# EAGLE board source_eagle (EAGLE 9.6.2)
REV: A
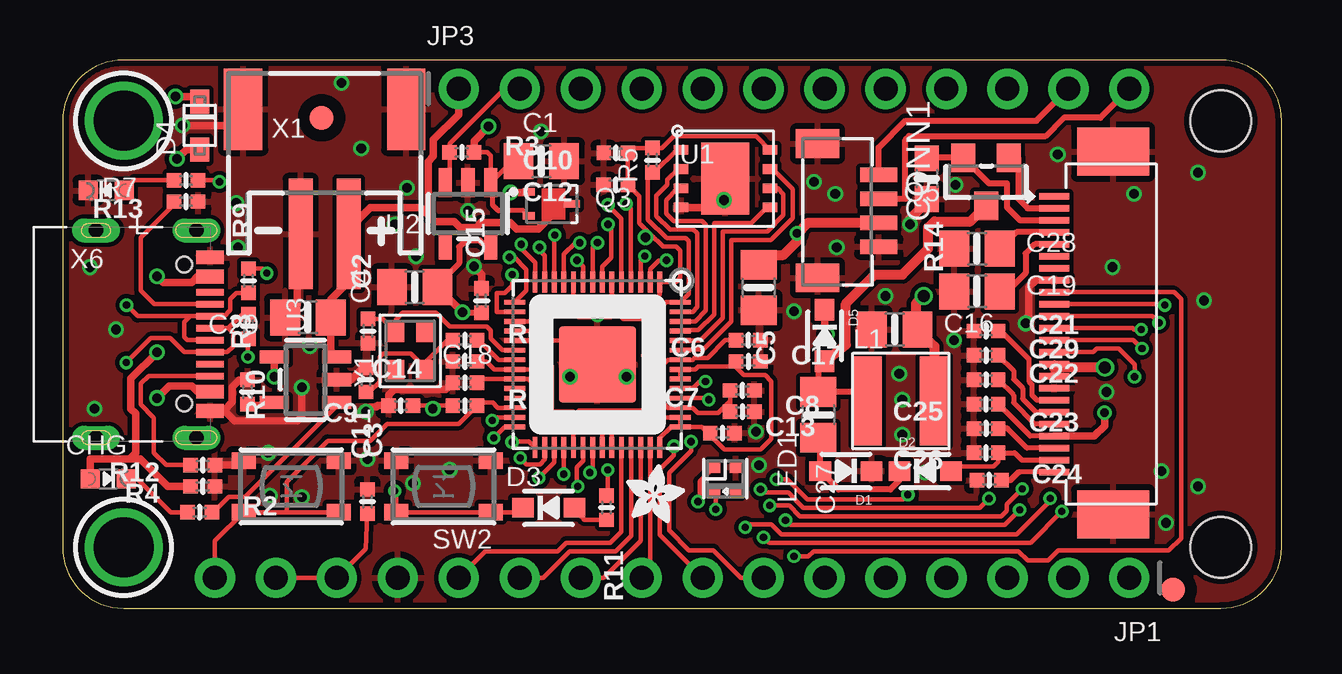
[diagram p0: board, top side]
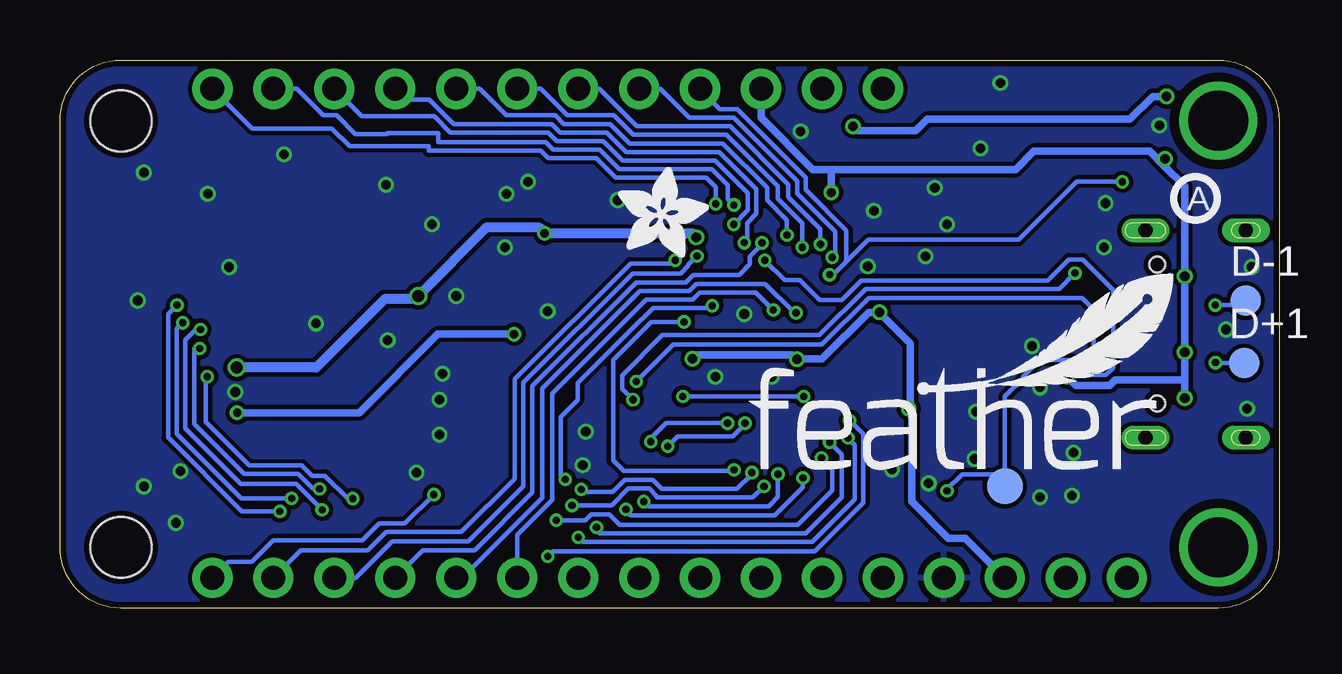
[diagram p1: board, bottom side, seen from below]

Size 50.8 x 22.86 mm. Coordinates in mm from the lower left corner, seen from the top.
Outline: 2.54,0 48.26,0 arc90 50.8,2.54 50.8,20.32 arc90 48.26,22.86 2.54,22.86 arc90 0,20.32 0,2.54 arc90 2.54,0
Copper layers (1*16): Top 0.035mm / dielectric 1.5mm / Bottom 0.035mm
Design rules "adafruit 7-7 *": minimum track width 7mil, minimum drill 8mil, track to track 7mil, track to pad 7mil, pad to pad 7mil, via to via 7mil, smd to smd 7mil, copper to edge 10mil, drill to drill 8mil, minimum pad ring 7mil, minimum via ring 5mil, stop-mask expansion 2mil, vias tented up to drill 20mil, thermal gap 10mil
Net classes: 1 power: width 0.305 mm; 2 lowpower: width 0.254 mm, drill 0.381 mm
Holes 2.54 mm at 48.26,20.32 48.26,2.54

## Footprints (pad centres in the part's own frame; a part is rotated, then mirrored left to right if it is on the bottom)
0805-NO = smd 1.24 x 1.5: 1 -0.95,0; 2 0.95,0
_0402NO = smd 0.6 x 0.6: 1 -0.508,0; 2 0.508,0
CHIPLED_0603_NOOUTLINE = smd 0.8 x 0.8: A 0,-0.75; C 0,0.75
JST_SH4_RA = smd 0.6 x 1.55: 1 1.5,0.924; 2 0.5,0.924; 3 -0.5,0.924; 4 -1.5,0.924 | smd 1.2 x 1.8: MT1 -2.8,-1.624; MT2 2.8,-1.624
SOD-323_MINI = smd 0.9 x 0.8: A 1.07,0; C -1.07,0
SOD-323F = smd 1 x 0.8: A -1,0; C 1,0
B1,27 = smd 1.27 x 1.27: TP 0,0
EINK_24PIN = smd 0.275 x 1.25: 1 5.75,0.98; 2 5.25,0.98; 3 4.75,0.98; 4 4.25,0.98; 5 3.75,0.98; 6 3.25,0.98; 7 2.75,0.98; 8 2.25,0.98; 9 1.75,0.98; 10 1.25,0.98; 11 0.75,0.98; 12 0.25,0.98; 13 -0.25,0.98; 14 -0.75,0.98; 15 -1.25,0.98; 16 -1.75,0.98; 17 -2.25,0.98; 18 -2.75,0.98; 19 -3.25,0.98; 20 -3.75,0.98; 21 -4.25,0.98; 22 -4.75,0.98; 23 -5.25,0.98; 24 -5.75,0.98 | smd 2 x 3: SPRT1 7.6,-1.48; SPRT2 -7.51,-1.48
QFN56_7MM_REDUCEDEPAD = smd 0.875 x 0.2: 1 -3.45,2.6; 2 -3.45,2.2; 3 -3.45,1.8; 4 -3.45,1.4; 5 -3.45,1; 6 -3.45,0.6; 7 -3.45,0.2; 8 -3.45,-0.2; 9 -3.45,-0.6; 10 -3.45,-1; 11 -3.45,-1.4; 12 -3.45,-1.8; 13 -3.45,-2.2; 14 -3.45,-2.6; 29 3.45,-2.6; 30 3.45,-2.2; 31 3.45,-1.8; 32 3.45,-1.4; 33 3.45,-1; 34 3.45,-0.6; 35 3.45,-0.2; 36 3.45,0.2; 37 3.45,0.6; 38 3.45,1; 39 3.45,1.4; 40 3.45,1.8; 41 3.45,2.2; 42 3.45,2.6 | smd 0.2 x 0.875: 15 -2.6,-3.45; 16 -2.2,-3.45; 17 -1.8,-3.45; 18 -1.4,-3.45; 19 -1,-3.45; 20 -0.6,-3.45; 21 -0.2,-3.45; 22 0.2,-3.45; 23 0.6,-3.45; 24 1,-3.45; 25 1.4,-3.45; 26 1.8,-3.45; 27 2.2,-3.45; 28 2.6,-3.45; 43 2.6,3.45; 44 2.2,3.45; 45 1.8,3.45; 46 1.4,3.45; 47 1,3.45; 48 0.6,3.45; 49 0.2,3.45; 50 -0.2,3.45; 51 -0.6,3.45; 52 -1,3.45; 53 -1.4,3.45; 54 -1.8,3.45; 55 -2.2,3.45; 56 -2.6,3.45 | smd 3.2 x 3.2: P$1 0,0
1X16_ROUND = drill 1 pad 1.676: 1 -19.05,0; 2 -16.51,0; 3 -13.97,0; 4 -11.43,0; 5 -8.89,0; 6 -6.35,0; 7 -3.81,0; 8 -1.27,0; 9 1.27,0; 10 3.81,0; 11 6.35,0; 12 8.89,0; 13 11.43,0; 14 13.97,0; 15 16.51,0; 16 19.05,0
1X12_ROUND = drill 1 pad 1.676: 1 -13.97,0; 2 -11.43,0; 3 -8.89,0; 4 -6.35,0; 5 -3.81,0; 6 -1.27,0; 7 1.27,0; 8 3.81,0; 9 6.35,0; 10 8.89,0; 11 11.43,0; 12 13.97,0
INDUCTOR_4X4MM_NR401 = smd 1.2 x 3.7: P$1 -1.4,0; P$2 1.4,0
SK6805_1515 = smd 0.5 x 0.5: 1 -0.5,-0.45; 2 0.5,-0.45; 3 0.5,0.45; 4 -0.5,0.45
DFN2015-3 = smd 0.5 x 0.31: 1 -0.95,0.5; 2 -0.95,-0.5 | smd 0.65 x 0.31: 3 0.825,0
SOT23-WIDE = smd 1 x 1.2: 1 -0.95,-1; 2 0.95,-1; 3 0,1
0603-NO = smd 1.075 x 1: 1 -0.85,0; 2 0.85,0
BTN_RKB2_4.6X2.8 = smd 1 x 0.7: A 1.973,1.075; A' -1.973,1.075; B 1.973,-1.075; B' -1.973,-1.075
TESTPOINT_ROUND_1.5MM_NO = smd 1.5 x 1.5: P$1 0,0
USON8_4X4 = smd 0.6 x 0.4: 1 -1.85,1.2; 2 -1.85,0.4; 3 -1.85,-0.4; 4 -1.85,-1.2; 5 1.85,-1.2; 6 1.85,-0.4; 7 1.85,0.4; 8 1.85,1.2 | smd 2 x 3: PAD 0,0
SOT23-5 = smd 0.55 x 1.2: 1 -0.95,-1.3; 2 0,-1.3; 3 0.95,-1.3; 4 0.95,1.3; 5 -0.95,1.3
MOUNTINGHOLE_2.5_PLATED = drill 2.5 pad 3.2: P$1 0,0
FIDUCIAL_1MM = smd 1 x 1: 1 0,0
JSTPH2_BATT = smd 1 x 4.6: 1 -1,-2.049; 2 1,-2.049 | smd 1.6 x 3.4: NC1 -3.4,3.151; NC2 3.4,3.151
USB_C_CUSB31-CFM2AX-01-X = smd 0.575 x 1.15: A1B12 -3.2,2.275; A4B9 -2.4,2.275; B1A12 3.2,2.275; B4A9 2.4,2.275 | smd 0.275 x 1.15: A5 -1.25,2.275; A6 -0.25,2.275; A7 0.25,2.275; A8 1.25,2.275; B5 1.75,2.275; B6 0.75,2.275; B7 -0.75,2.275; B8 -1.75,2.275 | drill 0.6 pad 1 long: M1 -4.32,1.7; M2 4.32,1.7; M3 -4.32,-2.48; M4 4.32,-2.48 | hole 0.65: 2.89,1.2; -2.89,1.2
CRYSTAL_2.5X2 = smd 0.9 x 0.75: 1 -0.825,-0.625; 2 0.825,-0.625; 3 0.825,0.625; 4 -0.825,0.625

## Placement (x,y rotation side)
C1  10uF/16V  [0805-NO]  19.94,18.63 0 top
C2  22pF  [_0402NO]  12.73,11.56 90 top
C3  22pF  [_0402NO]  12.64,9.53 270 top
C4  10uF/16V  [0805-NO]  14.67,13.38 180 top
C5  10uF/16V  [0805-NO]  29.01,13.37 270 top
C6  0.1uF  [_0402NO]  28.57,11.18 180 top
C7  0.1uF  [_0402NO]  28.32,9.08 180 top
C8  1uF/25V  [_0402NO]  28.32,8.19 0 top
C9  0.1uF  [_0402NO]  14.1,8.45 180 top
C10  1uF/25V  [_0402NO]  23.06,18.98 180 top
C11  1uF/25V  [_0402NO]  12.7,4.45 90 top
C12  0.1uF  [_0402NO]  23.05,17.65 180 top
C13  0.1uF  [_0402NO]  27.5,7.3 0 top
C14  0.1uF  [_0402NO]  16.76,10.29 180 top
C15  1uF/25V  [_0402NO]  17.46,12.83 90 top
C16  10uF/16V  [0805-NO]  34.67,11.62 0 top
C17  1uF/25V  [_0402NO]  28.57,10.29 0 top
C18  0.1uF  [_0402NO]  16.76,9.4 0 top
C19  10uF/16V  [0805-NO]  38.1,13.21 0 top
C20  10uF/16V  [0805-NO]  10.22,12.13 180 top
C21  1uF/25V  [_0402NO]  38.48,11.56 0 top
C22  1uF/25V  [_0402NO]  38.48,9.53 0 top
C23  1uF/25V  [_0402NO]  38.48,7.49 0 top
C24  1uF/25V  [_0402NO]  38.61,5.33 0 top
C25  1uF/25V  [_0402NO]  38.48,8.51 180 top
C26  1uF/25V  [_0402NO]  38.48,6.48 180 top
C27  10uF/16V  [0805-NO]  31.5,8.06 270 top
C28  10uF/16V  [0805-NO]  38.1,14.99 0 top
C29  1uF/25V  [_0402NO]  38.48,10.54 0 top
CHG  ORANGE  [CHIPLED_0603_NOOUTLINE]  1.91,5.4 270 top
CONN1  STEMMA_I2C_QTRA  [JST_SH4_RA]  33.08,16.57 270 top
D1  1N5819  [SOD-323_MINI]  32.64,5.71 180 top
D2  1N5819  [SOD-323_MINI]  35.94,5.71 0 top
D3  1N5819  [SOD-323_MINI]  20.26,4.19 0 top
D4  PMEG2020AEA  [SOD-323F]  5.71,20.13 90 top
D5  1N5819  [SOD-323_MINI]  31.75,11.37 270 top
D+1  TPB1,27  [B1,27]  1.46,10.22 0 bottom
D-1  TPB1,27  [B1,27]  1.4,12.83 0 bottom
EINK2  EINK_24PIN_CONNECTOR  [EINK_24PIN]  42.29,11.43 90 top
IC1  RP2040_QFN56  [QFN56_7MM_REDUCEDEPAD]  22.29,10.16 270 top
JP1  [1X16_ROUND]  25.4,1.27 180 top
JP3  [1X12_ROUND]  30.48,21.65 0 top
L  RED  [CHIPLED_0603_NOOUTLINE]  1.82,17.42 90 top
L1  10uH  [INDUCTOR_4X4MM_NR401]  34.92,8.64 0 top
LED1  WS2812B_SK6805_1515  [SK6805_1515]  27.61,5.4 270 top
PLABEL0  [PLABEL0]  16.07,7.37 0 top
PLABEL1  [PLABEL1]  9.78,7.37 0 top
PLABEL2  [PLABEL2]  3.8,5.77 90 top
PLABEL3  [PLABEL3]  3.54,17.26 90 top
PLABEL4  [PLABEL4]  6.35,2.79 0 top
PLABEL5  [PLABEL5]  13.97,2.79 0 top
PLABEL6  [PLABEL6]  16.51,2.79 0 top
PLABEL7  [PLABEL7]  19.05,2.79 0 top
PLABEL8  [PLABEL8]  21.59,2.79 0 top
PLABEL9  [PLABEL9]  24.13,2.79 0 top
PLABEL10  [PLABEL10]  26.67,2.79 0 top
PLABEL11  [PLABEL11]  29.21,2.79 0 top
PLABEL12  [PLABEL12]  27.69,20.57 0 top
PLABEL13  [PLABEL13]  24.13,20.19 0 top
PLABEL14  [PLABEL14]  21.59,20.19 0 top
PLABEL15  [PLABEL15]  19.05,20.19 0 top
PLABEL16  [PLABEL16]  16.51,20.19 0 top
PLABEL17  [PLABEL17]  10.29,2.79 0 top
PLABEL18  [PLABEL18]  35.31,13.97 0 top
PLABEL19  [PLABEL19]  34.29,20.19 0 top
PLABEL20  [PLABEL20]  36.83,20.19 0 top
PLABEL21  [PLABEL21]  39.37,20.19 0 top
PLABEL22  [PLABEL22]  41.53,19.43 270 top
PLABEL23  [PLABEL23]  45.97,21.34 90 top
PLABEL24  [PLABEL24]  31.75,2.79 0 top
PLABEL25  [PLABEL25]  34.29,2.79 0 top
PLABEL26  [PLABEL26]  36.83,2.79 0 top
PLABEL27  [PLABEL27]  39.37,2.79 0 top
PLABEL28  [PLABEL28]  41.4,2.79 0 top
PLABEL29  [PLABEL29]  45.59,2.29 0 top
PLABEL30  [PLABEL30]  30.23,20.57 0 top
PLABEL31  [PLABEL31]  32.77,20.57 0 top
PLABEL32  [PLABEL32]  27.56,9.78 90 top
PLABEL33  [PLABEL33]  47.88,11.56 90 top
PLABEL34  [PLABEL34]  30.1,3.68 0 top
PLABEL35  [PLABEL35]  6.48,2.92 0 bottom
PLABEL36  [PLABEL36]  13.84,2.92 0 bottom
PLABEL37  [PLABEL37]  16.38,2.92 0 bottom
PLABEL38  [PLABEL38]  18.92,2.92 0 bottom
PLABEL39  [PLABEL39]  21.46,2.92 0 bottom
PLABEL40  [PLABEL40]  24,2.92 0 bottom
PLABEL41  [PLABEL41]  26.54,2.92 0 bottom
PLABEL42  [PLABEL42]  29.08,2.92 0 bottom
PLABEL43  [PLABEL43]  9.91,2.92 0 bottom
PLABEL44  [PLABEL44]  31.62,2.92 0 bottom
PLABEL45  [PLABEL45]  34.29,2.92 0 bottom
PLABEL46  [PLABEL46]  36.7,2.92 0 bottom
PLABEL47  [PLABEL47]  39.24,2.92 0 bottom
PLABEL48  [PLABEL48]  41.78,2.92 0 bottom
PLABEL49  [PLABEL49]  26.54,19.94 0 bottom
PLABEL50  [PLABEL50]  24,19.94 0 bottom
PLABEL51  [PLABEL51]  21.46,19.94 0 bottom
PLABEL52  [PLABEL52]  18.92,19.94 0 bottom
PLABEL53  [PLABEL53]  16.38,19.94 0 bottom
PLABEL54  [PLABEL54]  34.16,19.94 0 bottom
PLABEL55  [PLABEL55]  36.7,19.94 0 bottom
PLABEL56  [PLABEL56]  39.24,20.07 0 bottom
PLABEL57  [PLABEL57]  41.66,20.07 0 bottom
PLABEL58  [PLABEL58]  28.96,19.94 0 bottom
PLABEL59  [PLABEL59]  31.75,19.94 0 bottom
PLABEL60  [PLABEL60]  45.09,20.07 0 bottom
PLABEL61  [PLABEL61]  44.32,2.92 0 bottom
PLABEL62  [PLABEL62]  50.16,14.86 0 bottom
PLABEL63  [PLABEL63]  9.91,20.19 0 bottom
PLABEL64  [PLABEL64]  50.16,5.97 0 bottom
PLABEL65  [PLABEL65]  38.93,9.78 0 bottom
PLABEL66  [PLABEL66]  15.37,15.11 0 bottom
Q3  DMG3415UFY  [DFN2015-3]  20.38,16.85 0 top
Q5  IRLML0100  [SOT23-WIDE]  38.48,17.78 180 top
R1  10K  [_0402NO]  16.76,8.45 0 top
R2  10K  [_0402NO]  5.71,4 0 top
R3  10K  [_0402NO]  16.64,19.01 0 top
R4  10K  [_0402NO]  5.84,5.08 180 top
R5  10K  [_0402NO]  24.59,18.68 90 top
R6  1K  [_0402NO]  16.76,11.18 0 top
R7  10K  [_0402NO]  5.14,17.84 180 top
R8  5.1K  [_0402NO]  7.71,9.02 90 top
R9  22 ohm  [_0402NO]  7.75,13.65 90 top
R10  22 ohm  [_0402NO]  7.75,11.75 270 top
R11  1K  [_0402NO]  22.67,4.19 270 top
R12  5.1K  [_0402NO]  5.84,5.97 180 top
R13  5.1K  [_0402NO]  5.14,16.95 180 top
R14  0.47ohm  [0603-NO]  36,17.91 270 top
SW1  RKB2  [BTN_RKB2_4.6X2.8]  9.53,5.08 180 top
SW2  RKB2  [BTN_RKB2_4.6X2.8]  15.88,5.08 180 top
TP3  [TESTPOINT_ROUND_1.5MM_NO]  11.43,5.08 0 bottom
U1  8MB QSPI  [USON8_4X4]  27.62,17.91 0 top
U2  RT9080-3.3  [SOT23-5]  16.89,16.45 180 top
U3  MCP73831T-2ACI/OT  [SOT23-5]  10.12,9.53 90 top
U$13  [PCBFEAT-REV-040]  3.49,17.08 0 bottom
U$28  [ADAFRUIT_2.5MM]  23.5,3.56 0 top
U$31  MOUNTINGHOLE2.5  [MOUNTINGHOLE_2.5_PLATED]  2.54,20.32 270 top
U$32  MOUNTINGHOLE2.5  [MOUNTINGHOLE_2.5_PLATED]  2.54,2.54 270 top
U$34  FIDUCIAL_1MM  [FIDUCIAL_1MM]  10.79,20.45 270 top
U$35  FIDUCIAL_1MM  [FIDUCIAL_1MM]  46.28,0.77 270 top
U$42  [ADAFRUIT_3.5MM]  27.56,14.61 0 bottom
U$46  [FEATHERLOGO_MED]  22.23,5.71 0 bottom
X1  JSTPH  [JSTPH2_BATT]  10.92,17.65 0 top
X6  USB Type C  [USB_C_CUSB31-CFM2AX-01-X]  3.87,11.43 270 top
Y1  12MHz/12pF  [CRYSTAL_2.5X2]  14.48,10.73 90 top

## Library data of the parts
C1-C3 C5-C29 D1-D3 D5 JP1 JP3 L1 R1-R14 TP3 U1 U$28 U$42 Y1 = microbuilder
C4 = microbuilder; COMPANY: ADAFRUIT INDUSTRIES; DRAWN: KTOWN; REV: A
CHG L Q5 = microbuilder; ROT: 270
CONN1 = adafruit_electromech; LCSC: C145961
D4 = adafruit
D+1 D-1 = testpad
EINK2 = adafruit_display
IC1 = adafruit_micro; LCSC: C2040
LED1 = microbuilder; LCSC: C2890035
PLABEL0 PLABEL1-PLABEL66 = pinguin
Q3 = microbuilder; ROT: 180
SW1 SW2 = adafruit_electromech
U2 = adafruit_power; JLC_ROTATION: 0
U3 = microbuilder; JLC_ROTATION: 270; LCSC: C424093
U$13 = microbuilder; REV: A
U$31 U$32 = adafruit_electromech; BOM: EXCLUDE
U$34 U$35 = microbuilder; BOM: EXCLUDE
U$46 = feather_silks
X1 = adafruit_electromech; LCSC: C47647
X6 = adafruit_electromech; LCSC: C165948

## Nets
1.2V: C6.2 C7.2 C8.1 C18.2 IC1.23 IC1.45 IC1.50
!RESET: IC1.26 JP1.16 R1.2 SW1.A SW1.A'
+3V3: C4.1 C5.1 C9.1 C10.1 C11.1 C12.1 C13.1 C14.1 C15.1 C16.2 C17.1 CONN1.2 EINK2.15 EINK2.16 IC1.1 IC1.10 IC1.22 IC1.33 IC1.42 IC1.43 IC1.44 IC1.48 IC1.49 JP1.14 JP1.15 L1.P$2 R1.1 R5.2 U1.8 U2.5
A0: IC1.38 JP1.12
A1: IC1.39 JP1.11
A2: IC1.40 JP1.10
A3: IC1.41 JP1.9
CC1: R13.2 X6.A5
CC2: R12.2 X6.B5
D4: IC1.6 JP1.1
D5: IC1.7 JP3.10
D6: IC1.8 JP3.9
D9: IC1.12 JP3.8
D10: IC1.13 JP3.7
D11: IC1.14 JP3.6
D12: IC1.15 JP3.5
D13: IC1.16 JP3.4 R7.1
D24: IC1.36 JP1.8
D25: IC1.37 JP1.7
D+: IC1.47 R10.2
D-: IC1.46 R9.2
EN: JP3.2 R3.1 U2.3
EPD_BUSY: EINK2.9 IC1.27
EPD_CS: EINK2.12 IC1.30
EPD_DC: EINK2.11 IC1.29
EPD_MOSI: EINK2.14 IC1.35
EPD_RST: EINK2.10 IC1.28
EPD_SCK: EINK2.13 IC1.34
GDR: EINK2.2 Q5.1
GND [power]: C1.2 C2.1 C3.1 C4.2 C5.2 C6.1 C7.1 C8.2 C9.2 C10.2 C11.2 C12.2 C13.2 C14.2 C15.2 C16.1 C17.2 C18.1 C19.1 C20.2 C21.1 C22.1 C23.1 C24.1 C25.2 C26.2 C28.1 C29.1 CONN1.1 CONN1.MT1 CONN1.MT2 D1.C EINK2.8 EINK2.17 EINK2.SPRT1 EINK2.SPRT2 IC1.19 IC1.P$1 JP1.13 L.C LED1.4 R4.1 R8.2 R12.1 R13.1 R14.2 SW1.B SW1.B' SW2.B SW2.B' U1.4 U1.PAD U2.2 U3.2 X1.1 X1.NC1 X1.NC2 X6.A1B12 X6.B1A12
MISO: IC1.11 JP1.4
MOSI: IC1.18 JP1.5
N$1: CHG.C R2.1
N$2: L.A R7.2
N$3: R2.2 U3.1
N$4: R8.1 U3.5
N$5: C2.2 IC1.20 Y1.3
N$6: C3.2 R6.1 Y1.1
N$7: IC1.21 R6.2
N$8: C19.2 EINK2.5
N$9: C21.2 EINK2.18
N$10: C22.2 EINK2.20
N$11: C27.2 D1.A D2.C
N$12: C27.1 D5.A L1.P$1 Q5.3
N$13: C28.2 EINK2.4
N$14: C29.2 EINK2.19
N$16: D3.A R11.2
N$27: C23.2 EINK2.22
N$33: C24.2 EINK2.24
NEOPIX_PWR: IC1.31 LED1.2
NEOPIXEL: IC1.32 LED1.1
QSPI_CS: IC1.56 R5.1 R11.1 U1.1
QSPI_DATA[0]: IC1.53 U1.5
QSPI_DATA[1]: IC1.55 U1.2
QSPI_DATA[2]: IC1.54 U1.3
QSPI_DATA[3]: IC1.51 U1.7
QSPI_SCK: IC1.52 U1.6
RESE: EINK2.3 Q5.2 R14.1
RX: IC1.3 JP1.3
SCK: IC1.17 JP1.6
SCL: CONN1.4 IC1.5 JP3.11
SDA: CONN1.3 IC1.4 JP3.12
SWCLK: IC1.24
SWDIO: IC1.25
TX: IC1.2 JP1.2
USB_D+: D+1.TP R10.1 X6.A6 X6.B6
USB_D-: D-1.TP R9.1 X6.A7 X6.B7
USBBOOT: D3.C IC1.9 SW2.A SW2.A' TP3.P$1
VBAT [power]: C20.1 JP3.1 Q3.3 U3.3 X1.2
VBUS [power]: CHG.A D4.A JP3.3 Q3.1 R4.2 U3.4 X6.A4B9 X6.B4A9
VGH: C25.1 D5.C EINK2.21
VGL: C26.1 D2.A EINK2.23
VHI: C1.1 D4.C Q3.2 R3.2 U2.1

## Tracks (layer width: path | path; a pad name or v marks a point on that pad's centre or on a via)
1.2V  (via drill 0.3)
  Top 0.178: C18.2 17.43,9.56 IC1.23 19.4,9.56 19.97,8.98 v19.81,8.83 | C6.2 27.62,11.18 26.88,10.44 26.33,10.44 26.25,10.36 IC1.50 25.22,10.36 25.02,10.16 25.02,8.76 | 25.02,8.76 25.02,8.57 25.03,8.56 25.03,8.55 25.22,8.36 IC1.45 26.25,8.36 26.44,8.17 26.44,8.16 26.47,8.14 27.32,8.14 27.81,8.64 C7.2 C8.1 | v24.85,8.83 24.96,8.83 25.02,8.76
  Bottom 0.178: v24.85,8.83 v19.81,8.83
!RESET
  Top 0.178: IC1.26 18.14,8.36 17.92,8.58 17.41,8.58 R1.2 16.51,7.68 13.53,7.68 12.83,6.99 11.05,6.99 9.34,5.27 9.34,4 | 9.34,4 SW1.A 6.35,2.8 JP1.16 | 9.34,4 SW1.A'
+3V3  (via drill 0.35, 0.38, 0.39, 0.4, 0.5)
  Top 0.178: C14.1 17.65,10.29 17.98,9.96 IC1.22 19.68,9.96 v20.1,10.38 20.38,10.1 20.38,8.26 20.43,8.21 21.29,8.21 21.29,8.02 | IC1.48 IC1.49 26.36,9.96 26.48,10.08 27.86,10.08 C17.1 28.07,10.03 28.38,9.72 29.27,9.72 29.53,9.46 29.53,7.05 29.1,6.62 27.57,6.62 26.94,7.25 | IC1.43 IC1.44 24.98,7.96 24.68,8.26 24.26,8.26 | 26.94,7.25 26.63,7.56 IC1.43 | IC1.42 24.89,7.09 25.36,7.56 IC1.43 | U1.8 28.89,19.68 25.46,19.68 24.97,19.19 R5.2 23.78,19.19 C10.1 23.56,18.97 C12.1 24.03,17.18 24.03,16.07 24.49,15.6 | C11.1 12.63,2.47 JP1.14 JP1.15 | IC1.33 21.29,8.02 | 24.26,8.26 21.53,8.26 21.29,8.02 | 24.26,8.26 24.26,10.54 24.26,12.06 | 24.26,12.06 24.26,12.45 24.89,13.08 IC1.1 25.56,13.61 25.73,13.78 25.73,14.92 25.58,15.07 25.02,15.07 24.49,15.6 | 24.26,12.06 23.37,12.06 22.56,12.87 21.45,12.87 21.29,13.04 IC1.10 | U2.5 17.78,15.21 | C9.1 15.43,8.45 v15.43,8.32 15.56,8.45 R1.1 | 26.94,7.25 C13.1 | 24.49,15.6 24.36,15.47 v24.29,15.47
  Top 0.254: 17.78,15.21 17.51,15.21 17.39,15.34 16.8,15.34 16.52,15.06 16.52,14.38 15.62,13.48 | v16.66,12.33 17.45,12.33 C15.1
  Top 0.305: v16.66,12.33 16.66,12.34 C4.1 15.62,13.48 | v24.45,10.4 24.31,10.54 24.26,10.54 | EINK2.15 41.31,10.03 EINK2.16
  Top 0.406: C5.1 29.01,14.53 29.21,14.73 30.04,14.73 30.61,15.3 v30.61,15.63 31.05,16.07 CONN1.2 | v43.43,10.03 41.31,10.03 | L1.P$2 36.33,10.92 C16.2 35.56,11.68 35.56,12.7 v35.88,13.02
  Bottom 0.305: JP1.14 13.08,2.92 13.78,2.92 15.3,4.45 15.3,8.19 v15.43,8.32 15.37,8.38 15.37,11.04 v16.66,12.33 17.11,12.33 19.06,10.38 v20.1,10.38 20.28,10.57 24.32,10.57 24.45,10.44 v24.45,10.4
  Bottom 0.406: v24.29,15.47 24.45,15.63 v30.61,15.63 30.86,15.88 33.01,15.88 v35.88,13.02 36.01,12.89 37.27,12.89 40.13,10.03 v43.43,10.03
A0
  Top 0.178: IC1.38 23.29,3.19 22.83,2.73 20.98,2.73 20.63,2.38 17.61,2.38 JP1.12
A1
  Top 0.178: IC1.39 23.69,3.02 23.04,2.38 21.13,2.38 20.03,1.27 JP1.11
A2
  Top 0.178: JP1.10 22.54,1.27 24.09,2.82 IC1.40
A3
  Top 0.178: IC1.41 24.49,1.63 JP1.9
CC1
  Top 0.178: X6.A5 3.83,12.68 3.27,13.24 3.27,15.46 4.64,16.83 R13.2
CC2
  Top 0.178: R12.2 4.32,5.97 3.81,6.48 3.81,7.94 3.27,8.49 3.27,9.36 3.6,9.69 5.55,9.69 5.56,9.68 X6.B5
D4  (via drill 0.3)
  Top 0.178: IC1.6 22.89,13.09 23.37,12.61 v23.62,12.61 | v29.75,5.37 30.2,5.37 31.02,4.55 35.03,4.55 v35.22,4.74
  Bottom 0.178: v23.62,12.61 23.71,12.52 26.09,12.52 26.54,12.06 26.55,12.06 29.23,9.38 29.23,8.67 29.93,7.98 29.93,5.52 29.78,5.37 v29.75,5.37 | v35.22,4.74 36.43,3.53 37.49,3.53 38.2,2.82 41.92,2.82 42.82,1.92 43.8,1.92 JP1.1
D5  (via drill 0.3)
  Top 0.178: v22.73,16 22.87,15.86 22.87,14.63 22.49,14.24 IC1.7
  Bottom 0.178: v22.73,16 22.14,16.59 22.14,17.31 23.5,18.67 27.35,18.67 28.16,19.48 30.11,19.48 30.46,19.84 34.54,19.84 35.21,20.51 38.23,20.51 JP3.10
D6  (via drill 0.3)
  Top 0.178: v22.29,15.24 22.09,15.04 IC1.8
  Bottom 0.178: v22.29,15.24 22.23,15.24 22.16,15.3 22.16,16.07 21.78,16.45 21.78,17.47 23.33,19.02 27.2,19.02 28.01,19.84 29.96,19.84 30.32,20.19 34.39,20.19 35.41,21.21 36.39,21.21 JP3.9
D9  (via drill 0.3)
  Top 0.178: v20.51,15.56 20.49,15.54 IC1.12
  Bottom 0.178: v20.51,15.56 20.51,16.19 21.34,17.02 21.34,17.53 21.33,17.53 23.18,19.38 27.05,19.38 27.87,20.19 29.82,20.19 30.17,20.55 32.21,20.55 33.31,21.65 JP3.8
D10  (via drill 0.3)
  Top 0.178: IC1.13 20.09,14.71 19.88,14.92 v19.88,15.05
  Bottom 0.178: v19.88,15.05 19.88,16.07 20.89,17.08 20.89,17.59 23.04,19.74 26.91,19.74 27.72,20.55 29.67,20.55 30.77,21.65 JP3.7
D11  (via drill 0.3)
  Top 0.178: IC1.14 19.69,14.41 19.11,14.99 v19.11,15.18
  Bottom 0.178: v19.11,15.18 19.11,15.81 20.45,17.14 20.45,17.66 22.88,20.09 26.76,20.09 28.32,21.65 JP3.6
D12  (via drill 0.3)
  Top 0.178: IC1.15 19.32,13.24 19.32,14.12 18.81,14.63 v18.62,14.63
  Bottom 0.178: v18.62,14.63 18.5,14.76 18.5,15.7 20.09,17.3 20.09,17.8 22.73,20.45 24.57,20.45 25.78,21.65 JP3.5
D13  (via drill 0.3)
  Top 0.178: IC1.16 18.1,12.36 18.1,13.14 18.41,13.14 18.73,13.46 v18.73,13.91 | R7.1 6.48,17.84 v6.54,17.78
  Bottom 0.178: v6.54,17.78 8.45,17.78 10.86,15.37 17.12,15.37 18.03,14.45 | v18.73,13.91 18.58,13.91 18.03,14.45 | JP3.4 24.13,21.63 23.3,20.8 22.59,20.8 19.74,17.95 19.74,17.45 18.03,15.75 18.03,14.45
D24  (via drill 0.3)
  Top 0.178: IC1.36 22.49,7.44 22.44,7.49 22.44,7.52 v22.25,7.71 | v25.48,6.75 25.48,6.37 24.89,5.78 24.89,3.05 JP1.8
  Bottom 0.178: v22.25,7.71 22.44,7.52 22.44,7.49 22.76,7.17 25.06,7.17 v25.48,6.75
D25  (via drill 0.3)
  Top 0.178: IC1.37 22.89,7.61 v22.99,7.71 | v26.19,6.95 26.19,6.55 25.27,5.64 25.27,3.24 26.1,2.41 27.11,2.41 28.26,1.27 JP1.7
  Bottom 0.178: v26.19,6.95 26.19,7.07 25.54,7.72 23,7.72 v22.99,7.71
D+  (via drill 0.3)
  Top 0.178: IC1.47 25.77,9.19 26.29,9.19 26.55,9.45 v26.79,9.45 | v7.72,10.48 7.72,11.21 R10.2
  Bottom 0.178: v26.79,9.45 25.26,10.99 19.05,10.99 17.1,12.94 8.21,12.94 7.72,12.45 v7.72,10.48
D-  (via drill 0.3)
  Top 0.178: IC1.46 26.86,8.76 v26.92,8.69 | v8.51,13.97 8.32,14.16 R9.2
  Bottom 0.178: v26.92,8.69 27.37,9.14 27.37,9.71 25.7,11.38 19.16,11.38 17.23,13.31 9.17,13.31 v8.51,13.97
EN
  Top 0.178: U2.3 16.13,17.93 R3.1 16.13,19.37 18.41,21.65 JP3.2
EPD_BUSY  (via drill 0.3)
  Top 0.178: IC1.27 18.03,7.96 v17.9,7.83 | EINK2.9 46.32,13.18 46.61,12.89 46.61,2.92 46.1,2.41 41.49,2.41 41.06,1.99 40.22,1.99 39.83,2.38 31.29,2.38 31.08,2.16 v30.48,2.16
  Bottom 0.178: v17.9,7.83 17.33,7.26 17.33,4.39 19.34,2.38 30.26,2.38 v30.48,2.16
EPD_CS  (via drill 0.3)
  Top 0.178: EINK2.12 44.58,11.68 44.64,11.62 v44.95,11.62 | v19.07,6.26 19.33,6.01 19.9,6.01 20.09,6.2 IC1.30 | v30.12,3.67 30.31,3.48 39.26,3.48 v39.88,4.1
  Bottom 0.178: v19.07,6.26 18.63,5.82 18.63,4.92 20.06,3.48 27.47,3.48 27.91,3.92 28.67,3.92 28.92,3.67 v30.12,3.67 | v39.88,4.1 40.96,5.18 43.26,5.18 45.58,7.5 45.58,11.18 45.14,11.62 v44.95,11.62
EPD_DC  (via drill 0.3)
  Top 0.178: v18.73,6.92 18.77,6.96 19.43,6.96 IC1.29 | v28.45,3.37 28.48,3.37 28.6,3.5 29.52,3.5 29.94,3.09 39.76,3.09 41.15,4.47 v41.15,4.58 | v45.68,11.9 45.41,12.18 EINK2.11
  Bottom 0.178: v18.73,6.92 18.22,6.41 18.22,4.62 19.73,3.12 28.32,3.12 28.45,3.26 v28.45,3.37 | v45.68,11.9 45.94,11.65 45.94,7.26 43.25,4.58 v41.15,4.58
EPD_MOSI  (via drill 0.3)
  Top 0.178: IC1.35 22.09,5.77 v21.97,5.65 | EINK2.14 42.94,10.68 43.08,10.82 44,10.82 44.67,10.16 v44.67,9.65 | v38.6,4.57 38.22,4.19 30.87,4.19 30.24,4.83 29.21,4.83 v29.08,4.95
  Bottom 0.178: v21.97,5.65 21.97,5.59 22.59,4.97 25.73,4.97 26.11,5.34 27.26,5.34 27.76,4.84 28.97,4.84 v29.08,4.95 | v44.67,9.65 44.73,9.59 44.73,7.77 42.92,5.95 40.73,5.95 40.29,5.52 39.76,5.52 38.81,4.57 v38.6,4.57
EPD_RST  (via drill 0.3)
  Top 0.178: IC1.28 18.43,7.56 v17.97,7.1 | v29.21,2.96 29.44,2.73 40.33,2.73 v41.64,4.04 | EINK2.10 45.88,12.68 v45.92,12.64
  Bottom 0.178: v17.97,7.1 17.68,6.81 17.68,4.54 19.45,2.77 29.02,2.77 v29.21,2.96 | v45.92,12.64 46.29,12.27 46.29,7.11 43.22,4.04 v41.64,4.04
EPD_SCK  (via drill 0.3)
  Top 0.178: IC1.34 21.69,6.14 21.43,5.88 21.43,5.24 21.46,5.21 v21.46,5.08 | v29.46,4.28 30.28,4.28 30.72,3.83 39.11,3.83 39.33,4.06 39.33,4.32 v39.98,4.97 | v44.97,10.82 44.62,11.18 EINK2.13
  Bottom 0.178: 21.5,5.04 v21.46,5.08 21.93,4.61 25.94,4.61 25.94,4.67 26.25,4.99 27.11,4.99 27.82,4.28 v29.46,4.28 | v39.98,4.97 40.25,4.97 40.87,5.6 43.13,5.6 45.21,7.68 45.21,10.82 v44.97,10.82
GDR
  Top 0.254: EINK2.2 40.22,16.68 39.81,17.08 39.81,18.78 Q5.1
GND  (via drill 0.4)
  Top 0.178: IC1.19 20.97,11.16 21.02,11.11
  Top 0.305: X1.NC1 6.85,20.13 v5,20.13 | C3.1 12.52,10.03 12.01,9.53 U3.2 | U1.4 27.25,16.71 v27.56,17.02 27.62,17.08 U1.PAD | C18.1 15.98,9.12 13.82,9.12 13.59,8.89 C9.2 13.13,8.45 13.07,8.39 12.83,8.39 v12.64,8.19 | C15.2 17.46,13.92 17.14,14.24 v17.14,14.26 | IC1.P$1 21.65,10.16 v21.14,9.65 | R12.1 7.37,5.97 SW1.B | R8.2 7.37,9.53 7.07,9.23 7.07,8.6 6.71,8.23 | X6.B1A12 6.71,8.23 | 6.71,8.23 6.76,8.23 7.18,7.81 9.78,7.81 9.97,8 v9.97,9.21 | C20.2 9.78,12.63 9.78,14.96 9.92,15.1 X1.1 | EINK2.8 40.55,13.68 40.52,13.65 40.25,13.38 40.25,12.19 40.13,12.07 v40.13,11.87
  Top 0.406: 21.02,11.11 20.95,11.11 21.46,10.6 21.84,10.6 IC1.P$1 | R14.2 36.01,16.93 35.31,16.23 v35.31,16
  other vias: 11.62,21.91 8.57,6.48 9.97,4.64 12.7,6.22 16.13,5.78 23.5,9.65 28.89,7.37 13.84,16 16.89,16.57 14.73,14.67 8.64,4.7 14.61,5.21 22.29,12.27 2.22,11.62 1.33,8.32 1.14,14.22 7.24,16.89 7.3,15.05 10.3,10.93 19.94,19.88 12.45,19.18 14.35,17.53 34.99,8.7 34.99,7.24 34.86,9.78 32.26,15.05 32.19,17.27 31.31,17.78 37.21,17.65 43.75,14.22 43.5,9.02 47.31,5.08 47.56,12.83 47.31,18.16 44.64,17.27 41.47,18.92 45.78,5.71 45.97,3.56 29.02,5.97 37.15,11.18 35.94,5.65 34.29,13.02 30.48,12.38
  pour Top: 0,22.86 50.8,22.86 50.8,0 0,0
  pour Bottom: 0,22.86 50.8,22.86 50.8,0 0,0
MISO  (via drill 0.3)
  Top 0.178: v21.55,15.23 21.36,15.23 20.89,14.76 IC1.11
  Bottom 0.178: JP1.4 35.69,2.41 33.53,2.41 31.11,4.83 31.11,9.27 26.8,13.59 24.72,13.59 24.41,13.9 22.5,13.9 22.06,14.34 22.06,14.66 21.55,15.17 v21.55,15.23
MOSI  (via drill 0.3)
  Top 0.178: IC1.18 19.69,11.56 20.13,12 v20.13,12.32
  Bottom 0.178: JP1.5 34.04,1.27 30.71,4.6 30.71,9.16 26.64,13.23 24.57,13.23 24.28,13.53 21.41,13.53 20.2,12.32 v20.13,12.32
N$1
  Top 0.178: CHG.C 3.11,5.4 4.51,4 R2.1
N$2
  Top 0.178: L.A 2.99,17.84 R7.2
N$3
  Top 0.178: R2.2 6.29,4 6.92,4.64 7.62,4.64 11.42,8.44 U3.1
N$4
  Top 0.178: U3.5 8.76,8.51 R8.1
N$5
  Top 0.178: C2.2 13.35,12.06 Y1.3 13.85,12 14.17,12.32 15.56,12.32 16.13,11.74 17.68,11.74 17.84,11.59 17.84,11.24 18.32,10.76 IC1.20
N$6
  Top 0.178: R6.1 16.04,11.18 15.1,10.24 15.1,10.03 | 15.1,10.03 Y1.1 | C3.2 12.79,9.02 13.21,9.44 13.21,10.47 13.37,10.62 14.51,10.62 15.1,10.03
N$7
  Top 0.178: R6.2 17.47,10.98 17.55,10.98 18.18,10.36 IC1.21
N$8
  Top 0.254: EINK2.5 40.52,15.18 40.13,14.8 40.13,13.97 39.37,13.21 C19.2
N$9
  Top 0.203: C21.2 39.09,11.56 40.26,10.39 40.26,9.46 40.39,9.33 40.39,8.89 40.59,8.68 EINK2.18
N$10
  Top 0.203: EINK2.20 40.52,7.68 39.62,8.57 39.62,8.89 C22.2
N$11
  Top 0.254: C27.2 31.57,7.04 D1.A 32.33,4.95 34.49,4.95 34.87,5.33 D2.C
N$12
  Top 0.254: L1.P$1 33.15,9.01 C27.1 31.5,10.04 D5.A
  Top 0.406: D5.A 32.64,10.99 32.64,12.7 33.84,13.91 34.99,13.91 36.07,14.99 36.07,15.88 36.32,16.13 37.83,16.13 Q5.3
N$13
  Top 0.254: EINK2.4 39.74,15.68 C28.2
N$14
  Top 0.203: C29.2 39.62,9.91 39.62,9.56 40.01,9.18 40.01,8.73 40.55,8.18 EINK2.19
N$16
  Top 0.178: R11.2 21.74,3.68 D3.A
N$27
  Top 0.203: EINK2.22 40.18,6.68 39.37,7.49
  Top 0.254: 39.37,7.49 C23.2
N$33
  Top 0.203: EINK2.24 39.84,5.68
  Top 0.254: 39.84,5.68 39.5,5.33 C24.2
NEOPIX_PWR  (via drill 0.3)
  Top 0.178: IC1.31 20.49,6.08 v19.84,5.43 | LED1.2 27.21,4.84 v27.21,4.12
  Bottom 0.178: v19.84,5.43 19.84,5.04 21.02,3.86 27.02,3.86 27.21,4.06 v27.21,4.12
NEOPIXEL  (via drill 0.3)
  Top 0.178: LED1.1 26.54,5.28 26.54,4.51 v26.48,4.45 | IC1.32 v20.89,5.59 v20.88,5.59
  Bottom 0.178: v26.48,4.45 26.29,4.25 21.27,4.25 21.21,4.32 20.88,4.64 v20.88,5.59
QSPI_CS  (via drill 0.3)
  Top 0.178: 24.38,16.21 25.17,15.43 25.96,15.43 26.09,15.3 26.09,13.11 IC1.56 25.15,12.76 24.8,12.42 v24.8,11.94 | R11.1 22.72,4.75 v22.72,5.77 | 24.38,16.21 24.38,16.64 24.38,17.84 24.38,17.97 R5.1 24.65,18.17 25.58,19.11 U1.1 | 24.38,16.21
  Bottom 0.178: v22.72,5.77 22.77,5.71 27.3,5.71 27.75,6.16 27.75,10.36 26.17,11.94 v24.8,11.94
QSPI_DATA[0]
  Top 0.178: U1.5 29.35,16.71 28.7,16.07 27.17,16.07 27.15,16.05 27.15,12.26 26.49,11.59 25.77,11.59 IC1.53
QSPI_DATA[1]
  Top 0.178: U1.2 25.64,18.31 25.2,17.86 25.2,17.67 24.74,17.21 24.74,16.36 25.32,15.79 26.29,15.79 26.44,15.63 26.44,12.55 26.25,12.36 IC1.55
QSPI_DATA[2]
  Top 0.178: IC1.54 26.36,11.96 26.8,12.4 26.8,16 26.66,16.14 25.46,16.14 25.15,16.46 25.15,17.02 25.64,17.51 U1.3
QSPI_DATA[3]
  Top 0.178: U1.7 29.59,18.31 30.42,17.48 30.42,16.27 29.5,15.35 27.88,15.35 27.86,15.34 27.86,11.96 26.7,10.79 25.77,10.79 IC1.51
QSPI_SCK
  Top 0.178: U1.6 29.8,17.51 30.04,17.27 30.04,16.4 29.35,15.71 27.51,15.71 27.51,12.11 26.56,11.16 IC1.52
RESE
  Top 0.254: R14.1 36.03,18.78 Q5.2 38.59,17.72 39.35,17.72 39.35,16.72 39.89,16.18 EINK2.3
RX  (via drill 0.3)
  Top 0.178: IC1.3 24.09,14.51 v24.26,14.69
  Bottom 0.178: v24.26,14.69 24.62,14.32 24.62,14.28 24.94,13.96 26.94,13.96 31.5,9.4 31.5,5.08 33.78,2.79 36.96,2.79 38.48,1.27 JP1.3
SCK  (via drill 0.3)
  Top 0.178: v21.08,12.43 20.63,12.87 19.76,12.87 19.56,12.67 19.56,12.06 19.45,11.96 IC1.17
  Bottom 0.178: JP1.6 31.75,3.05 30.29,4.51 30.29,8.95 26.36,12.88 24.43,12.88 24.13,13.17 21.82,13.17 v21.08,12.43
SCL  (via drill 0.3)
  Top 0.178: v22.72,16.81 23.29,16.25 IC1.5
  Top 0.254: CONN1.4 34.01,19.21 35.12,20.32 40.58,20.32 JP3.11
  Bottom 0.178: v22.72,16.81 22.98,17.07 22.98,17.65 23.64,18.31 27.5,18.31 28.31,19.13 30.26,19.13 30.56,19.43 35.03,19.43 35.03,19.81 37.16,19.81 37.19,19.77 38.5,19.77 39.28,20.55 39.83,20.55 40.93,21.65 JP3.11
SDA  (via drill 0.3)
  Top 0.178: v23.48,16.86 23.67,16.67 23.67,13.63 IC1.4
  Top 0.254: CONN1.3 35.12,17.07 35.12,19.53 35.27,19.68 40.96,19.68 41.72,20.45 43.24,20.45 JP3.12
  Bottom 0.178: v23.48,16.86 23.48,17.56 23.88,17.96 27.64,17.96 28.46,18.77 30.45,18.77 30.76,19.07 35.43,19.07 35.43,19.27 38.73,19.27 39.47,20 42.8,20 JP3.12
TX  (via drill 0.3)
  Top 0.178: IC1.2 24.49,14.14 24.85,14.5 v25.16,14.5
  Bottom 0.178: v25.16,14.5 25.29,14.38 27.03,14.38 31.85,9.55 31.85,5.4 34.08,3.17 37.21,3.17 37.97,2.41 40.77,2.41 JP1.2
USB_D+  (via drill 0.3)
  Top 0.178: 6.91,11.68 7.49,12.26 R10.1 | X6.A6 6.91,11.68 | 6.91,11.68 7.11,11.48 7.11,10.92 6.87,10.68 X6.B6 5.07,10.68 4.49,11.26 3.67,11.26 v2.65,10.24
  Bottom 0.178: v2.65,10.24 2.63,10.22 D+1.TP
USB_D-  (via drill 0.3)
  Top 0.178: X6.A7 5.2,11.18 5.08,11.3 5.08,11.94 5.32,12.18 X6.B7 | X6.B7 6.18,12.15 6.71,12.15 6.99,12.43 6.99,12.89 7.24,13.14 R9.1 | X6.B7 3.12,12.18 v2.67,12.64
  Bottom 0.178: v2.67,12.64 1.59,12.64 D-1.TP
USBBOOT  (via drill 0.3)
  Top 0.178: D3.C 19.22,4 SW2.A' SW2.A 13.9,4.83 v13.84,4.89 | IC1.9 21.69,14.25 v21.43,14.51
  Bottom 0.178: v13.84,4.89 13.84,4.95 13.21,5.59 11.49,5.59 11.43,5.52 | TP3.P$1 11.43,5.52 | v21.43,14.51 20.61,13.68 19.98,13.68 19.15,12.85 18.22,12.85 17.41,13.66 9.64,13.66 8.76,14.54 8.19,14.54 6.92,13.27 6.92,10.03 7.23,9.72 8,9.72 8.64,10.35 9.97,10.35 10.67,9.65 10.67,9.59 11.43,8.83 11.43,5.52
VBAT
  Top 0.305: U3.3 11.17,10.72 C20.1 11.17,12.87 11.92,13.61 X1.2 11.92,15.8 12.83,16.7 14.92,16.7 15.23,16.4 | JP3.1 16.51,20.59 15.45,19.53 15.45,18.84 15.23,18.61 15.23,16.4 | 15.23,16.4 15.49,16.13 16.32,16.13 16.57,15.88 17.23,15.88 17.43,16.08 18.66,16.08 18.92,15.81 19.81,15.81 20.38,16.38 20.38,16.7 20.54,16.85 Q3.3
VBUS  (via drill 0.38, 0.4)
  Top 0.305: X6.A4B9 5.62,13.83 5.38,13.59 4.19,13.59 v3.94,13.84 | X6.B4A9 5.62,9.03 5.38,9.27 4.45,9.27 v3.94,8.76 | 2.79,6.22 1.16,6.22 CHG.A | 2.79,6.22 3.05,6.48 3.05,8.11 2.85,8.31 2.85,9.58 v3.94,10.67 | v4.76,18.73 5.16,19.13 D4.A | R4.2 4.38,5.08 3.24,6.22 2.79,6.22 | U3.4 v8.83,9.65 | Q3.1 19.42,17.34 v18.67,17.34
  Bottom 0.305: 3.94,9.53 v3.94,10.67 v3.94,13.84 3.94,17.59 4.83,18.48 | 3.94,9.53 v3.94,8.76 | 4.83,18.48 4.83,18.67 v4.76,18.73 | 4.83,18.48 5.4,19.05 10.22,19.05 10.99,18.29 18.61,18.29 | JP3.3 21.59,20.45 19.43,18.29 18.61,18.29 | 3.94,9.53 6.83,9.53 7.06,9.3 8.47,9.3 v8.83,9.65 | 18.61,18.29 18.67,18.22 v18.67,17.34
VGH  (via drill 0.35)
  Top 0.203: EINK2.21 40.32,7.18 C25.1
  Top 0.305: D5.C 31.75,11.56 v31.88,11.43 | v43.41,8.15 43.41,7.6 42.99,7.18 EINK2.21
  Bottom 0.305: v31.88,11.43 35.05,11.43 38.34,8.15 v43.41,8.15
VGL
  Top 0.178: C26.1 38.99,6.1 38.8,5.91 37.2,5.91 D2.A
  Top 0.203: EINK2.23 39.97,6.18 39.67,6.48 C26.1
VHI  (via drill 0.39)
  Top 0.178: R3.2 17.69,19.01 17.84,18.86 U2.1 | 17.92,17.67 U2.1 | C1.1 18.73,18.63 U2.1
  Top 0.203: Q3.2 19.21,16.57 18.16,16.57 17.92,16.82 17.92,17.67
  Top 0.305: D4.C 5.51,21.34 v4.7,21.34 | v17.75,20.09 17.14,19.48 R3.2
  Bottom 0.305: v4.7,21.34 5.27,21.34 6.22,20.38 14.67,20.38 15.15,19.9 17.56,19.9 v17.75,20.09

## Text on the board
Pinguin_tBackup: 12 | 11 | 10 | SDA | Bat | EN | USB | 13 | 9 | 6 | 5 | SCL | #13 | I2C | Standard / 24-Pin EPD | RP2040 | Reset | Boot | chg | ThinkINK Feather | Rst | 3.3V | GND | A0 | A1 | A2 | A3 | 24 | 25 | SCK | MO | MI | RX | TX | 4
Pinguin_bBackup: 3.7V/4.2V / LiPoly Battery / USB Charge | Bat | EN | USB | 13 | 12 | 11 | 10 | 9 | 6 | 5 | SCL | SDA | Adafruit RP2040 / Feather with ePaper | SCK: 22, MOSI: 23, Busy: 16, / Reset: 17, DC: 18, CS: 19 | Rst | 3.3V | GND | A0 | A1 | A2 | A3 | 24 | 25 | SCK | MO | MI | RX | TX | 4